# Altium PCB pcb - Copy.PcbDoc
Units mm, origin at the board's own origin, x right, y up, seen from the top; angles counter-clockwise.
Board outline 60 x 89 mm, 4 copper layers (Top Layer, Layer 1, Layer 2, Bottom Layer), stack 0.603 mm thick; 65 components, 43 nets, 221 pads, 96 vias.
Unrouted connection lines stored in the file: 3.
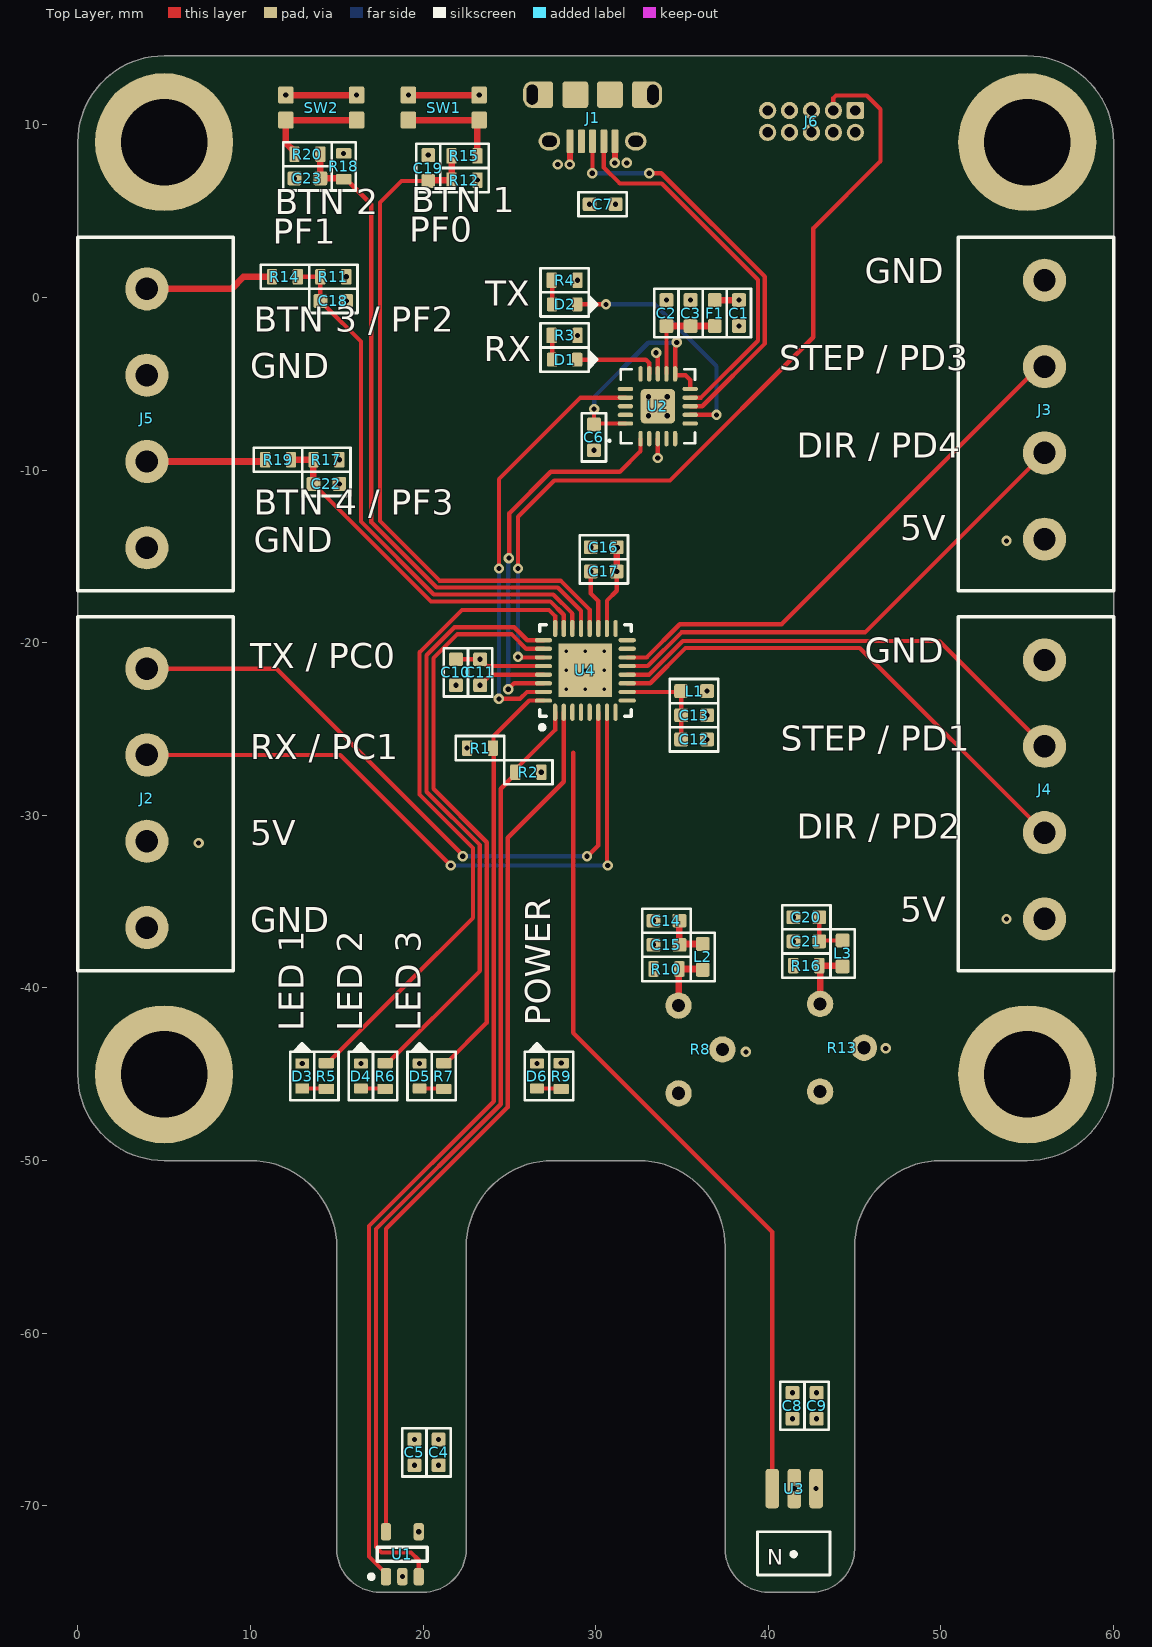
[diagram p0: Top Layer view]
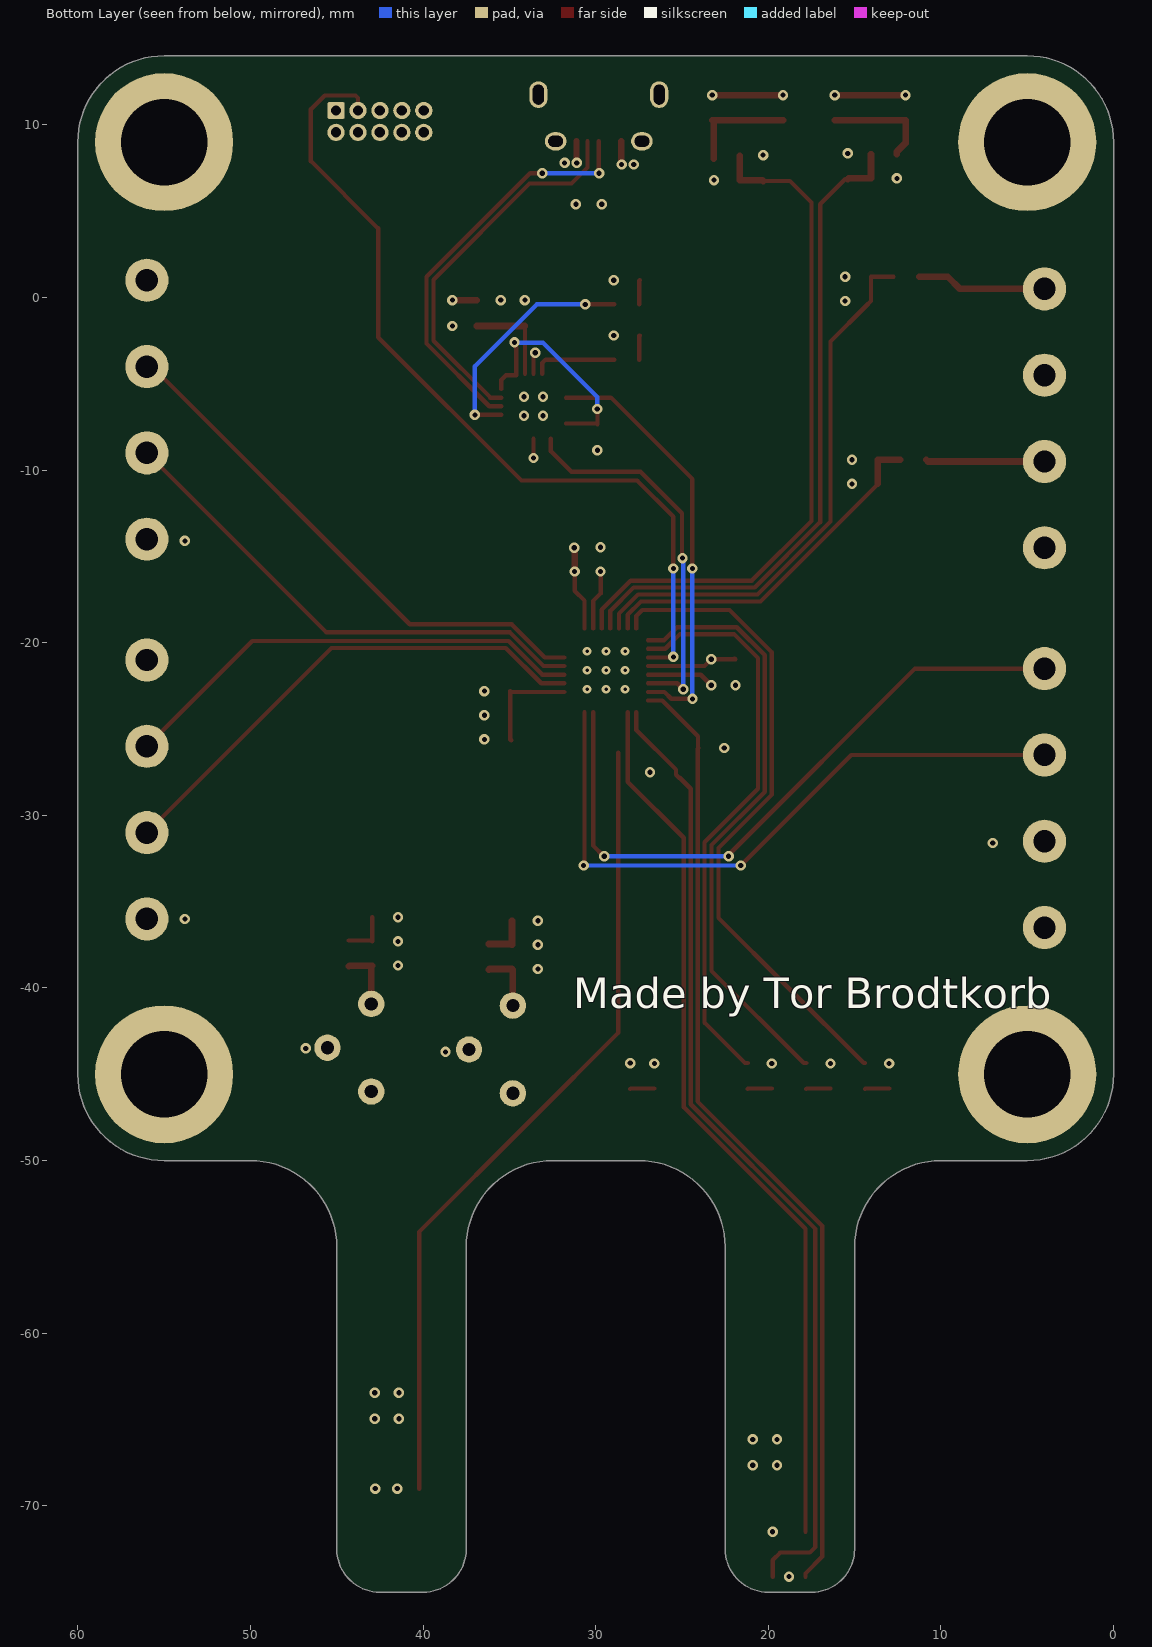
[diagram p1: Bottom Layer view, seen from below]
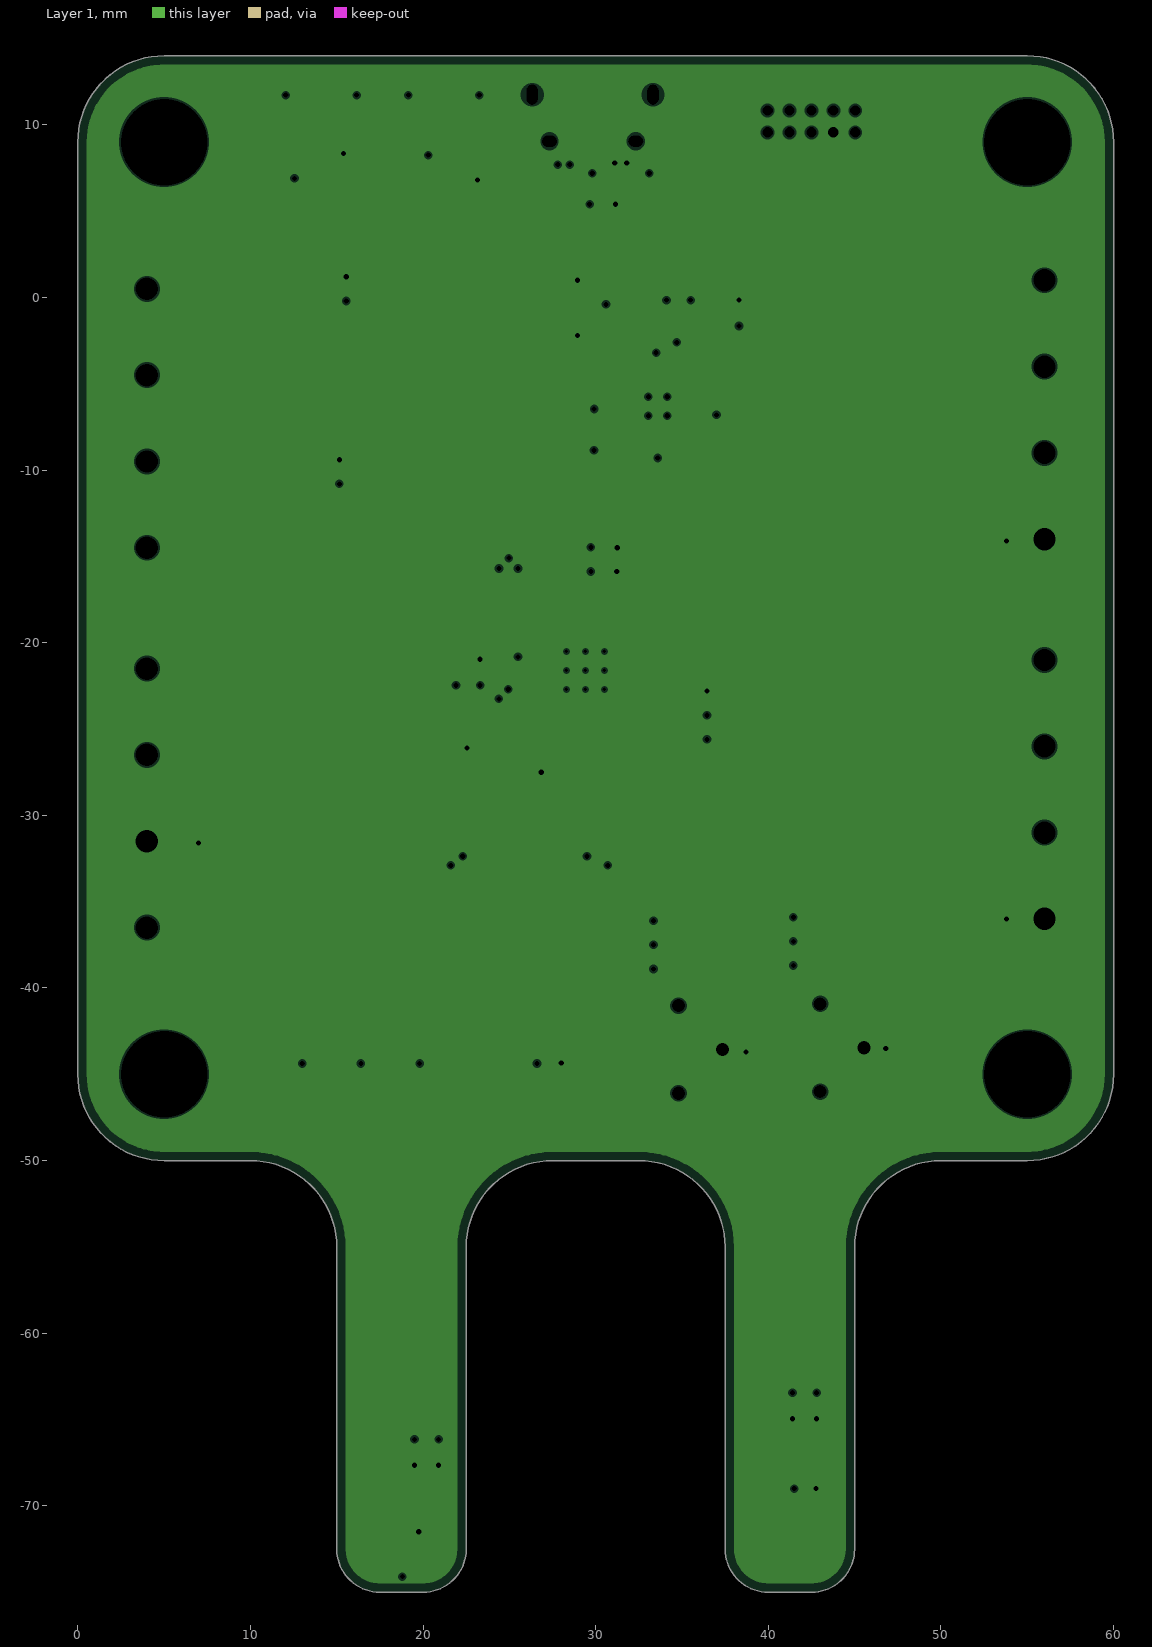
[diagram p2: Layer 1, clearances drawn from the general rule]
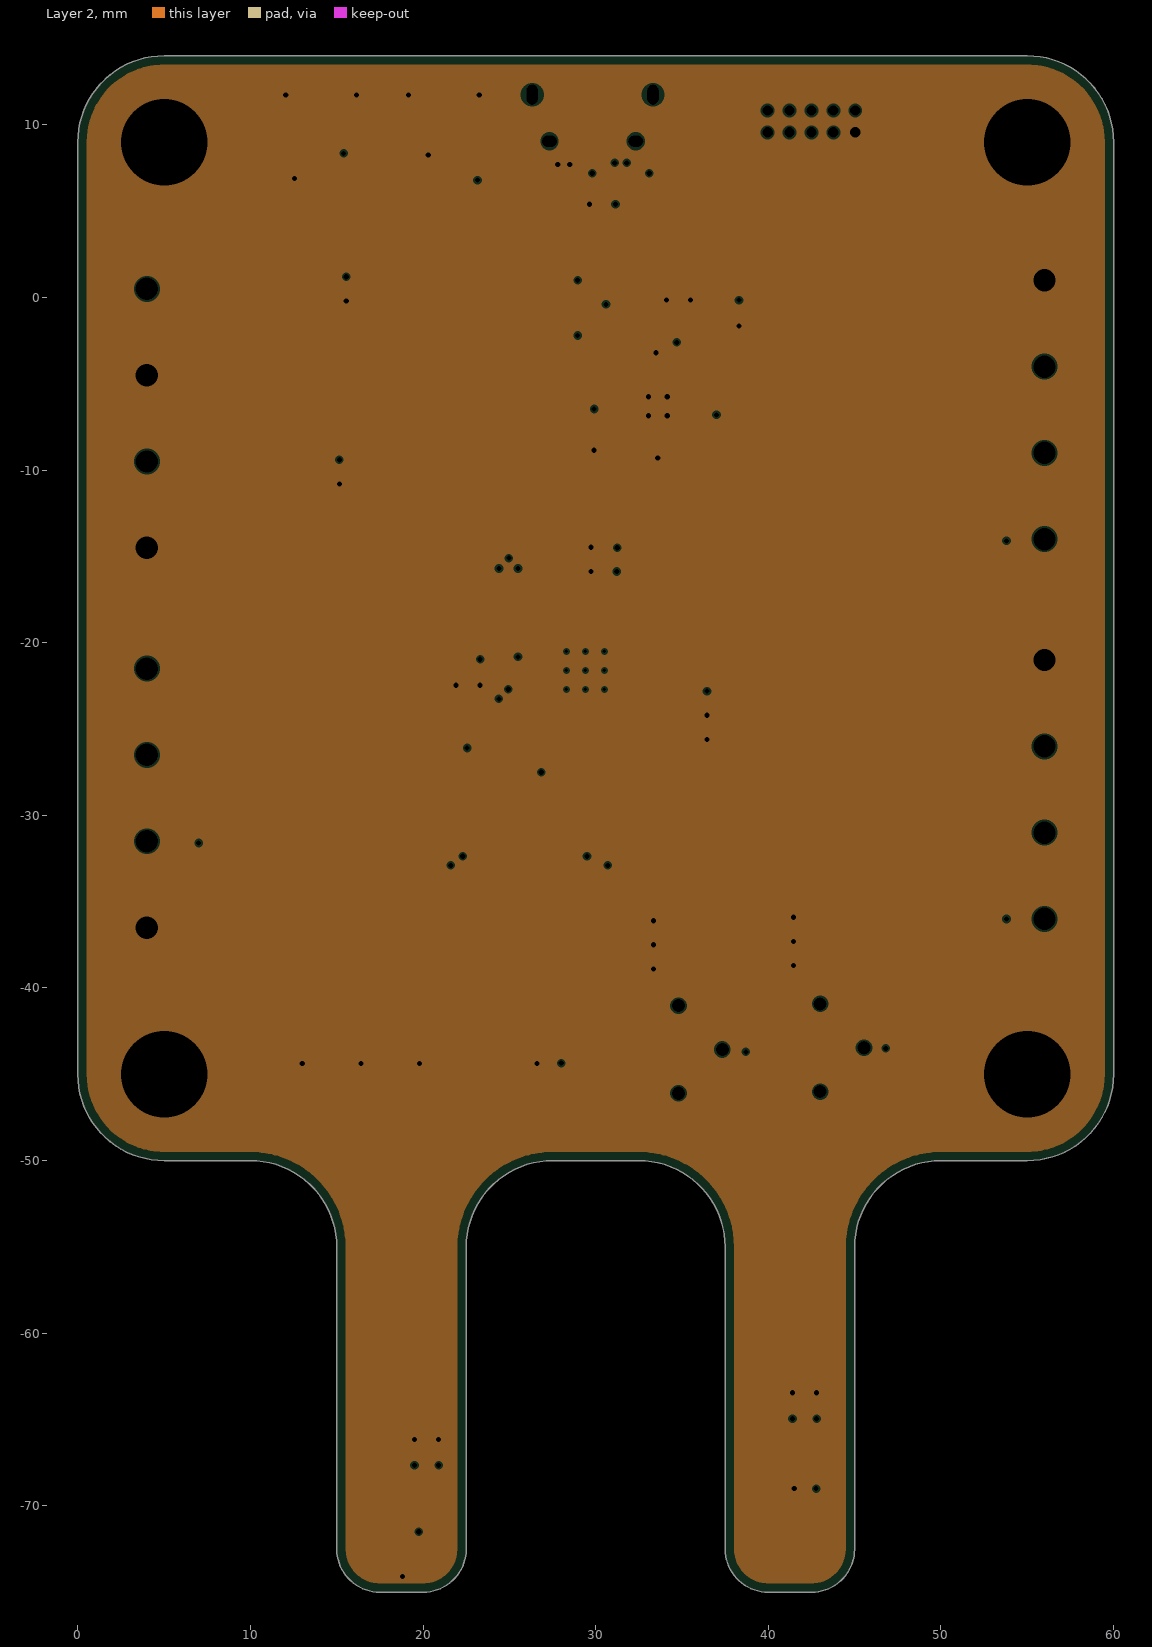
[diagram p3: Layer 2, clearances drawn from the general rule]
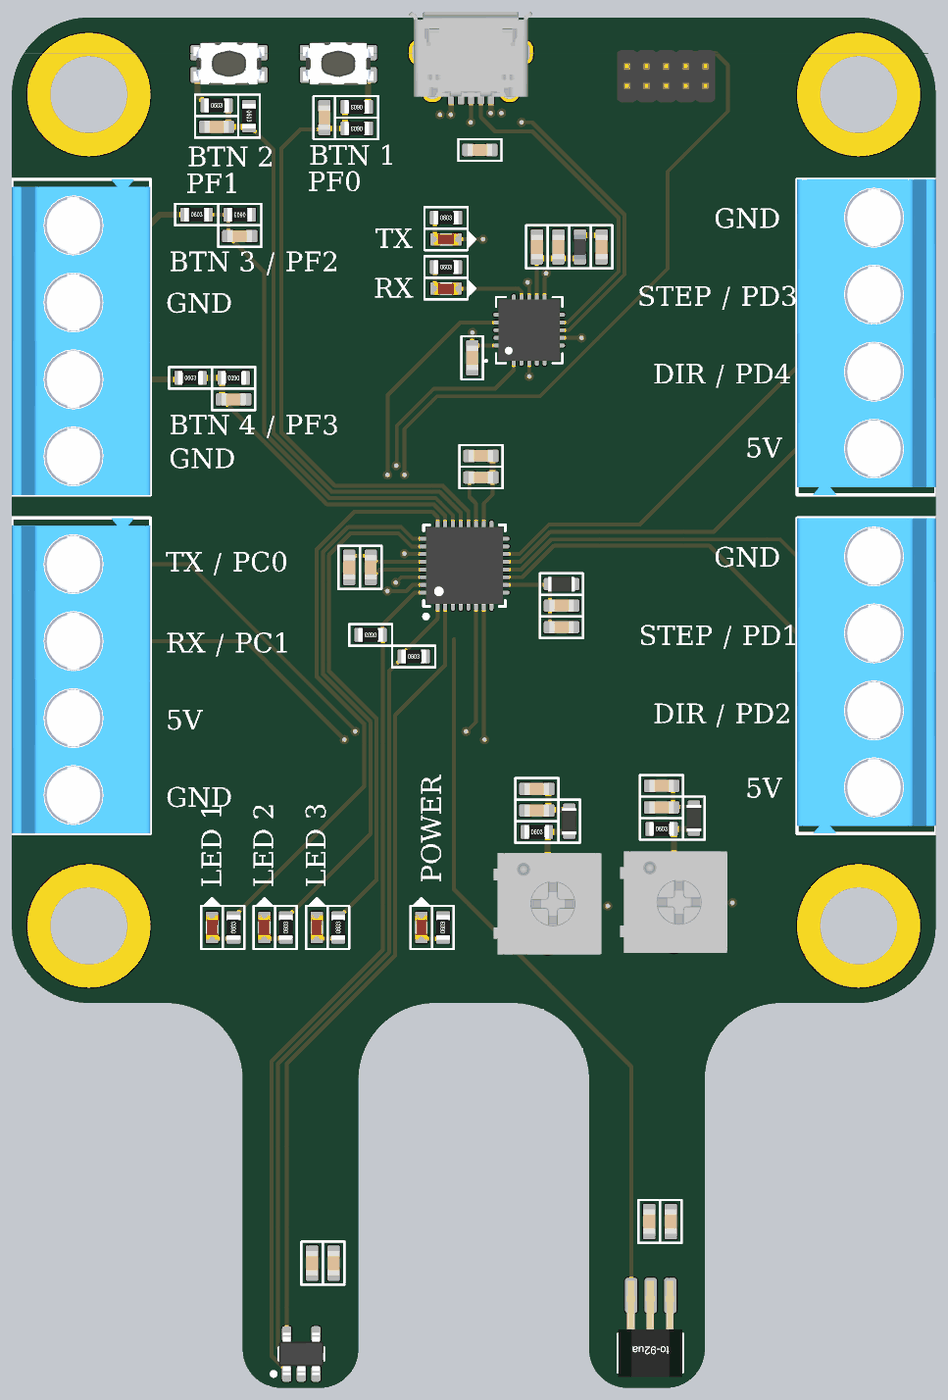
[diagram p4: 3D render of the assembled board from above, using the file's embedded part models]

## Layer stack, top to bottom
Top Solder: solder mask 0.0102, Solder Resist, Dk 3.5
Top Layer: signal copper 0.0356
Dielectric 2: prepreg 0.0711, PP-006, Dk 4.1
Layer 1: plane copper 0.035, net VDDIO2
Dielectric 1: dielectric 0.32, FR-4, Dk 4.8
Layer 2: plane copper 0.035, net GND
Dielectric 3: prepreg 0.0711, PP-006, Dk 4.1
Bottom Layer: signal copper 0.0356
Bottom Solder: solder mask 0.0102, Solder Resist, Dk 3.5

## Board outline
17.5,-75 cw(c17.5,-72.5) 15,-72.5 15,-55 ccw(c10,-55) 10,-50 5,-50 cw(c5,-45) 0,-45 0,9 cw(c5,9) 5,14 55,14 cw(c55,9) 60,9 60,-45 cw(c55,-45) 55,-50 50,-50 ccw(c50,-55) 45,-55 45,-72.5 cw(c42.5,-72.5) 42.5,-75 40,-75 cw(c40,-72.5) 37.5,-72.5 37.5,-55 ccw(c32.5,-55) 32.5,-50 27.5,-50 ccw(c27.5,-55) 22.5,-55 22.5,-72.5 cw(c20,-72.5) 20,-75

## Design rules (kind name [scope] priority, off if disabled: settings)
BoardOutlineClearance [All] p1: gap=0.198 ignorepadtopadclearanceinfootprint=FALSE except(0: Arc-SplitContinuation Track-SplitContinuation SMDPad-SplitContinuation THPad-SplitContinuation Via-SplitContinuation Fill-SplitContinuation Poly-SplitContinuation Region-SplitContinuation Text-SplitContinuation)
Clearance [All] p1: gap=0.152 ignorepadtopadclearanceinfootprint=TRUE except(0.305: Arc-Hole Track-Hole SMDPad-Hole THPad-Hole Via-Hole Fill-Hole Poly-Hole Region-Hole Text-Hole)
ComponentClearance [All] p1: gap=0.1 collisioncheckmode=3 verticalgap=0.1 showdistances=FALSE
DiffPairsRouting DiffPairsRouting_USB [InDifferentialPair('USB')] p1: maxlimit=0.5 minlimit=0.16 mostfreqgap=0.2 toplayer_minwidth=0.16 toplayer_maxwidth=5 toplayer_prefwidth=0.265 bottomlayer_minwidth=0.16 bottomlayer_maxwidth=5 bottomlayer_prefwidth=0.265 maxuncoupledlength=12.7
DiffPairsRouting DiffPairsRouting_ETH [InDifferentialPair('ETH_RX') or InDifferentialPair('ETH_TX')] p2: maxlimit=0.5 minlimit=0.16 mostfreqgap=0.194 toplayer_minwidth=0.16 toplayer_maxwidth=5 toplayer_prefwidth=0.22 bottomlayer_minwidth=0.16 bottomlayer_maxwidth=5 bottomlayer_prefwidth=0.22 maxuncoupledlength=12.7
DiffPairsRouting [All] p3: maxlimit=0.5 minlimit=0.16 mostfreqgap=0.3 toplayer_minwidth=0.16 toplayer_maxwidth=5 toplayer_prefwidth=0.3 bottomlayer_minwidth=0.16 bottomlayer_maxwidth=5 bottomlayer_prefwidth=0.3 maxuncoupledlength=12.7
HoleSize [All] p1: absolutevalues=TRUE maxlimit=6.3 minlimit=0.025 maxpercent=80.000 minpercent=20.000
MatchedLengths MatchedLengths_1 [InNetClass('RX')] p1: tolerance=2 checknetsindiffpair=FALSE checkdiffpairvsdiffpair=TRUE checkxsignals=TRUE checkothers=TRUE
MatchedLengths [InNetClass('TX')] p2: tolerance=2 checknetsindiffpair=FALSE checkdiffpairvsdiffpair=TRUE checkxsignals=TRUE checkothers=TRUE
MinimumAnnularRing [All] p1: minimumring=0.102
MinimumSolderMaskSliver [All] p1: minsoldermaskwidth=0.1
PlaneClearance [All] p1: clearance=0.1
PlaneConnect [All] p1: planeconnectstyle=Relief reliefexpansion=0.15 reliefentries=4 reliefconductorwidth=0.152 reliefairgap=0.2
PolygonConnect [All] p1: connectstyle=Relief reliefconductorwidth=0.152 reliefentries=4 polygonreliefangle="90 Angle" airgapwidth=0.152
RoutingVias [All] p1: holewidth=0.3 width=0.6 viastyle="Through Hole" minholewidth=0.2 minwidth=0.45 maxholewidth=6.3 maxwidth=10
SilkToSilkClearance [All] p1: silktosilkclearance=0.152
SilkToSolderMaskClearance [IsPad] p1: minsilkscreentomaskgap=0.152 clearancetoexposedcopper=TRUE
SolderMaskExpansion [All] p1: expansion=0.076 istentingtop=FALSE
Width [All] p1: maxlimit=10 minlimit=0.152 preferedwidth=0.152 minimp=50.000000 maximp=50.000000 favimp=50.000000
22 further rules are at their usual default settings.

## Components (designator, comment, footprint, x,y, rotation, side; value= is the part's Value field where it differs from the comment)
C1 "passive_5" "capacitor 0603" 38.3,-0.9 r90 top value=10nF
C2 "passive_5" "capacitor 0603" 34.1,-0.9 r270 top value=4.7uF
C3 "passive_5" "capacitor 0603" 35.5,-0.9 r270 top value=100nF
C4 "passive_5" "capacitor 0603" 20.9,-66.9 r270 top value=10uF
C5 "passive_5" "capacitor 0603" 19.5,-66.9 r270 top value=100nF
C6 "passive_5" "capacitor 0603" 29.9,-8.1 r90 top value=100nF
C7 "passive_5" "capacitor 0603" 30.4,5.4 r0 top value=10uF
C8 "passive_5" "capacitor 0603" 41.4,-64.2 r270 top value=10uF
C9 "passive_5" "capacitor 0603" 42.8,-64.2 r270 top value=100nF
C10 "passive_5" "capacitor 0603" 21.905,-21.71 r90 top value=10uF
C11 "passive_5" "capacitor 0603" 23.305,-21.71 r90 top value=100uF
C12 "passive_5" "capacitor 0603" 35.7,-25.6 r180 top value=10uF
C13 "passive_5" "capacitor 0603" 35.7,-24.2 r180 top value=100uF
C14 "passive_5" "capacitor 0603" 34.1,-36.1 r0 top value=100nF
C15 "passive_5" "capacitor 0603" 34.1,-37.5 r0 top value=10uF
C16 "passive_5" "capacitor 0603" 30.47,-14.47 r0 top value=10uF
C17 "passive_5" "capacitor 0603" 30.47,-15.87 r0 top value=100uF
C18 "passive_5" "capacitor 0603" 14.8,-0.2 r180 top value=100nF
C19 "passive_5" "capacitor 0603" 20.3,7.5 r270 top value=100nF
C20 "passive_5" "capacitor 0603" 42.2,-35.9 r0 top value=100nF
C21 "passive_5" "capacitor 0603" 42.2,-37.3 r0 top value=10uF
C22 "passive_5" "capacitor 0603" 14.4,-10.8 r180 top value=100nF
C23 "passive_5" "capacitor 0603" 13.3,6.9 r0 top value=100nF
D1 "LED Red" "LED 0603 red" 28.2,-3.6 r0 top
D2 "LED Red" "LED 0603 red" 28.2,-0.4 r0 top
D3 "LED Red" "LED 0603 red" 13,-45.1 r90 top
D4 "LED Red" "LED 0603 red" 16.4,-45.1 r90 top
D5 "LED Red" "LED 0603 red" 19.8,-45.1 r90 top
D6 "LED Red" "LED 0603 red" 26.6,-45.1 r90 top
F1 "passive_8" "ferrit bead 0603" 36.9,-0.9 r270 top value="480Ω @ 100MHz"
J1 "USB micro B" "USB mico B female" 29.82,10.4 r180 top
J2 "Header 2.54mm" TB001-500-04BE 4,-36.5 r90 top
J3 "Header 2.54mm" TB001-500-04BE 56,1 r270 top
J4 "Header 2.54mm" TB001-500-04BE 56,-21 r270 top
J5 "Header 2.54mm" TB001-500-04BE 4,-14.5 r90 top
J6 "Header 1.27mm" "header male 2x5, pitch 1.27mm" 42.5,10.2 r270 top
L1 "passive_9" "inductor 0603" 35.7,-22.8 r180 top value=10uH
L2 "passive_9" "inductor 0603" 36.2,-38.2 r90 top value=10uH
L3 "passive_9" "inductor 0603" 44.3,-38 r90 top value=10uH
R1 "passive_2" "resistor 0603" 23.3,-26.1 r180 top value=1kΩ
R2 "passive_2" "resistor 0603" 26.1,-27.5 r0 top value=1kΩ
R3 "passive_2" "resistor 0603" 28.2,-2.2 r0 top value=1kΩ
R4 "passive_2" "resistor 0603" 28.2,1 r0 top value=1kΩ
R5 "passive_2" "resistor 0603" 14.4,-45.1 r90 top value=1kΩ
R6 "passive_2" "resistor 0603" 17.8,-45.1 r90 top value=1kΩ
R7 "passive_2" "resistor 0603" 21.2,-45.1 r90 top value=1kΩ
R8 "passive_13" POT 37.34,-43.56 r270 top value=1kΩ
R9 "passive_2" "resistor 0603" 28,-45.1 r90 top value=1kΩ
R10 "passive_2" "resistor 0603" 34.1,-38.9 r0 top value=1kΩ
R11 "passive_2" "resistor 0603" 14.8,1.2 r180 top value=10kΩ
R12 "passive_2" "resistor 0603" 22.4,6.8 r180 top value=10kΩ
R13 "passive_13" POT 45.54,-43.46 r270 top value=1kΩ
R14 "passive_2" "resistor 0603" 12,1.2 r0 top value=1kΩ
R15 "passive_2" "resistor 0603" 22.4,8.2 r180 top value=1kΩ
R16 "passive_2" "resistor 0603" 42.2,-38.7 r0 top value=1kΩ
R17 "passive_2" "resistor 0603" 14.4,-9.4 r180 top value=10kΩ
R18 "passive_2" "resistor 0603" 15.4,7.6 r270 top value=10kΩ
R19 "passive_2" "resistor 0603" 11.6,-9.4 r0 top value=1kΩ
R20 "passive_2" "resistor 0603" 13.3,8.3 r0 top value=1kΩ
SW1 "sensor_3" "KMR621NG LFS" 21.2,11 r180 top
SW2 "sensor_3" "KMR621NG LFS" 14.1,11 r180 top
U1 "ic_14" SI7210-B-00-IVR 18.8,-72.8 r90 top
U2 "FTDI" FT231XQ-R 33.6,-6.3 r90 top
U3 "ic_15" SS495A1 42.77,-69 r180 top
U4 "cpu_7" AVRxxDB32 29.4,-21.6 r90 top

## Footprints (in the part's own frame and the unit in brackets; to place one, negate y for a bottom-side part, rotate by r counter-clockwise, add the part's x,y. Pads: shape width x height; smd on the part's side, far side on the other; paste and mask are expansions set on the pad)
AVRxxDB32 [mm] "QFN, 32-Leads, Body 5.00x5.00mm, Pitch 0.50mm, Thermal Pad 3.10x3.10mm, IPC Low Density"
  oval 1x0.25 smd: 1(-2.425,1.75) 2(-2.425,1.25) 3(-2.425,0.75) 4(-2.425,0.25) 5(-2.425,-0.25) 6(-2.425,-0.75) 7(-2.425,-1.25) 8(-2.425,-1.75) 17(2.425,-1.75) 18(2.425,-1.25) 19(2.425,-0.75) 20(2.425,-0.25) 21(2.425,0.25) 22(2.425,0.75) 23(2.425,1.25) 24(2.425,1.75)
  oval 0.25x1 smd: 9(-1.75,-2.425) 10(-1.25,-2.425) 11(-0.75,-2.425) 12(-0.25,-2.425) 13(0.25,-2.425) 14(0.75,-2.425) 15(1.25,-2.425) 16(1.75,-2.425) 25(1.75,2.425) 26(1.25,2.425) 27(0.75,2.425) 28(0.25,2.425) 29(-0.25,2.425) 30(-0.75,2.425) 31(-1.25,2.425) 32(-1.75,2.425)
  rect 3.1x3.1 smd: 33(0,0)
  silkscreen extent -3.42,-2.65 2.65,2.65, body extent -2.5,-2.5 2.5,2.5, height 0.8
"capacitor 0603" [mm]
  rrect25% 0.8x0.8 smd: 1(-0.75,0) 2(0.75,0)
  silkscreen extent -1.4,-0.7 1.4,0.7, body extent -0.8,-0.4 0.8,0.4, height 0.8
"ferrit bead 0603" [mm]
  rrect25% 0.8x0.8 smd: 1(-0.75,0) 2(0.75,0)
  silkscreen extent -1.4,-0.7 1.4,0.7, body extent -0.79,-0.4 0.81,0.4, height 0.8
FT231XQ-R [mm] "QFN, 20-Leads, Body 4.00x4.00mm, Pitch 0.50mm, Thermal Pad 1.98x1.98mm, IPC Medium Density"
  oval 0.9x0.25 smd: 1(-1.875,1) 2(-1.875,0.5) 3(-1.875,0) 4(-1.875,-0.5) 5(-1.875,-1) 11(1.875,-1) 12(1.875,-0.5) 13(1.875,0) 14(1.875,0.5) 15(1.875,1)
  oval 0.25x0.9 smd: 6(-1,-1.875) 7(-0.5,-1.875) 8(0,-1.875) 9(0.5,-1.875) 10(1,-1.875) 16(1,1.875) 17(0.5,1.875) 18(0,1.875) 19(-0.5,1.875) 20(-1,1.875)
  rrect20% 1.98x1.98 smd: 21(0,0)
  silkscreen extent -2.15,-2.15 2.15,2.85, body extent -2,-2 2,2, height 0.8
"header male 2x5, pitch 1.27mm" [mm]
  rrect25% 1x1 hole 0.6: 1(-0.635,2.54)
  round 1 hole 0.6: 2(0.635,2.54) 3(-0.635,1.27) 4(0.635,1.27) 5(-0.635,0) 6(0.635,0) 7(-0.635,-1.27) 8(0.635,-1.27) 9(-0.635,-2.54) 10(0.635,-2.54)
  body extent -1.7,-3.17 1.7,3.17, height 5.35
"inductor 0603" [mm]
  rrect25% 0.8x0.8 smd: 1(-0.75,0) 2(0.75,0)
  silkscreen extent -1.4,-0.7 1.4,0.7, body extent -0.87,-0.48 0.87,0.48, height 0.91
"KMR621NG LFS" [mm]
  rrect25% 0.9x1 smd: 1(-2.05,0.725) 1(2.05,0.725) 2(-2.05,-0.725) 2(2.05,-0.725)
  body extent -2.3,-1.4 2.3,1.4, height 1.9
"LED 0603 red" [mm]
  rrect25% 0.6x0.8 smd: 1(-0.725,0) 2(0.725,0)
  silkscreen extent -1.4,-0.7 1.9,0.7, body extent -0.8,-0.4 0.8,0.4, height 0.6
POT [mil]
  round 60 hole 30: 1(100,-100) 2(0,0) 3(-100,-100)
  body extent -130,-238 130,37, height 185
"resistor 0603" [mm]
  rrect25% 0.6x0.9 smd: 1(-0.75,0) 2(0.75,0)
  silkscreen extent -1.4,-0.7 1.4,0.7, body extent -0.8,-0.45 0.8,0.45, height 0.5
SI7210-B-00-IVR [mm] "SOT23, 5-Leads, Body 2.90x2.75mm, Pitch 0.95mm, IPC Medium Density"
  rrect50% 1x0.6 smd: 1(-1.3,0.95) 2(-1.3,0) 3(-1.3,-0.95) 4(1.3,-0.95) 5(1.3,0.95)
  silkscreen extent -1.42,-1.45 0.4,1.92, body extent -1.38,-1.45 1.38,1.45, height 1.25
SS495A1 [mm]
  rrect50% 0.8x2.3 smd: 1(0,0) 2(1.27,0) 3(2.54,0)
  silkscreen extent -0.8,2.5 3.4,5, body extent -0.79,-0.96 3.38,5.3, height 1.34
TB001-500-04BE [mm]
  round 2.5 hole 1.3: 1(15,0) 2(10,0) 3(5,0) 4(0,0)
  silkscreen extent -2.5,-5 18,4, body extent -2.5,-5 18,4, height 12.5
"USB mico B female" [mm]
  rrect25% 0.4x1.35 smd: 1(-1.3,1.35) 2(-0.65,1.35) 3(0,1.35) 4(0.65,1.35) 5(1.3,1.35)
  rrect100% 1.05x1.55 hole 0.65 slot 1.15 at 90 deg: 6(-3.5,-1.35) 6(3.5,-1.35)
  rrect25% 1.37x1.55 smd: 6(-2.975,-1.35) 6(2.975,-1.35)
  rrect100% 1.25x1.05 hole 0.65 slot 0.85 at 0 deg: 6(-2.5,1.35) 6(2.5,1.35)
  rrect25% 1.5x1.55 smd: 6(-1,-1.35) 6(1,-1.35)
  body extent -4.01,-3.99 4.03,1.59, height 2.76

## Part data
C1 C2 C3 C4 C5 C6 C7 C8 C9 C10 C11 C12 C13 C14 C15 C16 C17 C18 C19 C20 C21 C22 C23: "Capacitor 0603"
D1 D2 D3 D4 D5 D6: library part diode_0, "LED 0603 red"
F1: "Ferrite bead 0603"
J1: library part connector_34, "USB micro B (2.0)", Manufacturer 1="Amphenol ICC (FCI)", Manufacturer Part Number 1=10118194-0001LF, Supplier Part Number 1=609-4618-1-ND, Link=https://www.digikey.no/product-detail/en/amphenol-icc-fci/10118194-0001LF/609-4618-1-ND/2785382, Supplier 1=Digi-Key
J2 J3 J4 J5: library part connector_53, "Screw Terminal"
J6: library part connector_17, "Header male 2x5, pitch 1.27mm"
L1 L2 L3: "Inductor 0603"
R1 R2 R3 R4 R5 R6 R7 R9 R10 R11 R12 R14 R15 R16 R17 R18 R19 R20: "Resistor 0603"
R8 R13: "Potmeter"
SW1 SW2: "Tactile switch SMD, tiny", Manufacturer 1=C&K, Manufacturer Part Number 1="KMR621NG LFS", Supplier Part Number 1=CKN10684CT-ND, Link=https://www.digikey.no/product-detail/en/c-k/KMR621NG-LFS/CKN10684CT-ND/6035356, Supplier 1=Digi-Key
U1: "Hall-effect", Supplier Part Number 1=SI7210-B-00-IVR
U2: library part ic_1, "USB to UART converter, FTDI, single, 20 pins, QFN", Manufacturer 1="FTDI, Future Technology Devices International Ltd", Manufacturer Part Number 1=FT231XQ-R, Supplier Part Number 1=768-1128-1-ND, Supplier 1=Digi-Key
U3: "SS495A1"
U4: "AVRxxDB32"

## Free pads (board coordinates)
  round 8 hole 5: ""(5,-45) ""(5,9) ""(55,9) ""(55,-45)

## Via types
v1: diameter 0.6, hole 0.3, Top Layer to Bottom Layer, tented both sides, 83 vias
v2: diameter 0.5, hole 0.2, Top Layer to Bottom Layer, 9 vias
v3: diameter 0.6, hole 0.3, Top Layer to Bottom Layer, 4 vias

## Nets (pads, with @x,y where several pads share a name; then routed paths per layer and width w, separated by ;. In a path a pad name is that pad's centre, name@x,y a point inside that pad or via, vN(x,y) a via of type N, cw(c..) or ccw(c..) an arc to the next point about the centre after c; other vN are vias at no path point)
5V: C1.2 C4.2 C5.2 C7.2 C8.2 C9.2 C10.2 C11.2 C16.2 C17.2 F1.1 J1.1 J2.3 J3.1 J4.1 J6.4 L1.1 R1.2 R2.2 R3.2 R4.2 R8.2 R9.2 R11.1 R12.1 R13.2 R17.1 R18.1 U1.4 U3.1 U4.18 U4.28 | length 13
  Top Layer w0.25: C10.2@21.955,-20.91 C10.2 v1(23.305,-20.96) 23.695,-21.35 U4.28 ; U4.18 30.65,-17.56 31.22,-16.99 v1(31.22,-15.87) ; v1(31.1,7.8) v1@31.12,7.82 ; C16.2 C16.2@31.27,-14.52
  Top Layer w0.35: v1@31.12,7.82 J1.1
  Top Layer w0.381: v1(31.22,-15.87) C16.2 ; F1.1 v1(38.3,-0.15)
  other v1: 19.75,-71.5 42.77,-69 19.5,-67.65 20.9,-67.65 41.4,-64.95 42.8,-64.95 28,-44.35 38.7,-43.7 46.8,-43.5 53.8,-36 7,-31.6 26.85,-27.5 22.55,-26.1 36.45,-22.8 31.245,-14.495 53.8,-14.1 15.15,-9.4 28.95,-2.2 28.95,1 15.55,1.2 31.15,5.4 23.15,6.8 31.8,7.8 15.4,8.35
ALERT: U1.5 U4.2 | length 51.7
  Top Layer w0.25: U1.5 17.85,-53.95 24.9,-46.9 24.9,-31.3 28.15,-28.05 U4.2
DIR1: J4.3 U4.12 | length 27.5
  Top Layer w0.25: U4.12 33.088,-21.85 35.041,-19.898 49.898,-19.898 J4.3
DIR2: J3.3 U4.14 | length 31.2
  Top Layer w0.25: U4.14 32.95,-20.85 34.87,-18.93 40.77,-18.93 55.7,-4 J3.3
EXT_RX: J2.2 U4.7 | length 38.2
  Top Layer w0.25: J2.2 15.2,-26.5 v1(21.6,-32.9) ; U4.7 30.65,-32.796 30.7,-32.846 v1(30.7,-32.9)
  Bottom Layer w0.25: v1(21.6,-32.9) v1(30.7,-32.9)
EXT_TX: J2.1 U4.6 | length 38.7
  Top Layer w0.25: J2.1 11.5,-21.5 22.2,-32.2 22.2,-32.246 22.3,-32.346 v1(22.3,-32.37) ; v1(29.5,-32.37) 29.53,-32.37 30.15,-31.75 U4.6
  Bottom Layer w0.25: v1(22.3,-32.37) v1(29.5,-32.37)
GND: C1.1 C2.1 C3.1 C4.1 C5.1 C6.1 C7.1 C8.1 C9.1 C10.1 C11.1 C12.1 C13.1 C14.1 C15.1 C16.1 C17.1 C18.1 C19.1 C20.1 C21.1 C22.1 C23.1 D3.2 D4.2 D5.2 D6.2 J1.5 J2.4 J3.4 J4.4 J5.2 J5.4 J6.2 pad. R10.1 R16.1 SW1.2 SW2.2 U1.2 U2.3 U2.13 U2.21 U3.2 U4.19 U4.29 | length 19.4
  Top Layer w0.25: v1(23.305,-22.46) 23.915,-21.85 U4.29 ; v1(29.72,-15.87) 29.715,-15.875 29.715,-17.145 30.15,-17.58 U4.19 ; v1(33.5,-3.2) 33.5,-3.295 33.6,-3.395 U2.13 ; v1(33.6,-9.3) U2.3
  Top Layer w0.35: v1@28.52,7.7 J1.5
  Top Layer w0.381: v1(12.05,11.725) v1(16.15,11.725) ; v1(19.15,11.725) v1(23.25,11.725)
  other v1: 18.8,-74.1 41.5,-69 19.5,-66.15 20.9,-66.15 41.4,-63.45 42.8,-63.45 13,-44.375 16.4,-44.375 19.8,-44.375 26.6,-44.375 33.35,-38.9 41.45,-38.7 33.35,-37.5 41.45,-37.3 33.35,-36.1 41.45,-35.9 36.45,-25.6 36.45,-24.2 21.905,-22.46 29.72,-14.47 15.15,-10.8 29.9,-8.85 38.3,-1.65 15.55,-0.2 34.1,-0.15 35.5,-0.15 29.65,5.4 12.55,6.9 27.8,7.7 28.5,7.7 20.3,8.25
  other v3: 33.05,-6.85 34.15,-6.85 33.05,-5.75 34.15,-5.75
HALL: U3.3 U4.15 | length 47.4
  Top Layer w0.25: 28.7,-26.375 28.7,-42.6 33.7,-47.6 40.23,-54.13 U3.3
LED1: R5.2 U4.24 | length 38.4
  Top Layer w0.25: R5.2 14.475,-44.35 18.9,-39.925 22.888,-35.937 22.888,-31.888 19.795,-28.795 19.795,-20.557 22.252,-18.1 27.3,-18.1 27.65,-18.45 U4.24
LED2: R6.2 U4.25 | length 35
  Top Layer w0.25: R6.2 17.95,-44.35 23.29,-39.01 23.29,-31.721 20.198,-28.629 20.198,-20.723 21.823,-19.098 25.287,-19.098 26.039,-19.85 U4.25
LED3: R7.2 U4.26 | length 33.2
  Top Layer w0.25: R7.2 21.35,-44.35 23.693,-42.007 23.693,-31.555 20.6,-28.462 20.6,-20.89 21.99,-19.5 25.12,-19.5 25.97,-20.35 U4.26
NetC2_2: C2.2 C3.2 F1.2 U2.12 | length 5.6
  Top Layer w0.25: U2.12 34.1,-3.649 C2.2
  Top Layer w0.381: C2.2 C3.2 F1.2
NetC6_2: C6.2 U2.10 U2.11 U2.20 | length 12.9
  Top Layer w0.25: C6.2@29.895,-7.345 C6.2@29.9,-7.341 ; C6.2 C6.2@29.9,-7.341 ; v1(29.91,-6.46) 29.9,-6.47 C6.2@29.9,-7.341 ; U2.20 29.941,-7.3 C6.2@29.9,-7.341 ; U2.11@34.6,-4.5 35.2,-4.5 35.475,-4.775 U2.10 ; U2.11 34.6,-3.2 34.6,-2.921 34.633,-2.888 34.633,-2.667 v1(34.7,-2.6)
  Bottom Layer w0.25: v1(29.91,-6.46) 29.91,-5.76 33.05,-2.62 34.68,-2.62 v1(34.7,-2.6)
NetC14_2: C14.2 C15.2 L2.2 U4.16 | length 2.8
  Top Layer w0.381: C14.2 C15.2 34.9,-37.45 L2.2
NetC20_2: C20.2 C21.2 L3.2 U4.17 | length 2.8
  Top Layer w0.25: C20.2 C21.2 43,-37.25 L3.2
NetD1_1: D1.1 R3.1 | length 1.4
  Top Layer w0.25: R3.1 27.475,-2.225 D1.1
NetD2_1: D2.1 R4.1 | length 1.4
  Top Layer w0.25: R4.1 27.475,0.975 D2.1
NetD3_1: D3.1 R5.1 | length 1.4
  Top Layer w0.25: D3.1 14.375,-45.825 R5.1
NetD4_1: D4.1 R6.1 | length 1.4
  Top Layer w0.25: D4.1 17.775,-45.825 R6.1
NetD5_1: D5.1 R7.1 | length 1.4
  Top Layer w0.25: D5.1 21.175,-45.825 R7.1
NetD6_1: D6.1 R9.1 | length 1.4
  Top Layer w0.25: D6.1 27.975,-45.825 R9.1
NetJ1_2: J1.2 U2.9 | length 22
  Top Layer w0.25: J1.2 30.47,7.53 31.4,6.6 33.831,6.6 39.398,1.033 39.398,-2.502 36.1,-5.8 U2.9
NetJ1_3: J1.3 U2.8 | length 24
  Top Layer w0.25: v1(29.8,7.2) 29.82,7.22 J1.3 ; v1(33.1,7.2) 33.8,7.2 39.8,1.2 39.8,-2.669 36.169,-6.3 U2.8
  Bottom Layer w0.25: v1(29.8,7.2) v1(33.1,7.2)
NetJ5_1: J5.1 R14.1 | length 7.5
  Top Layer w0.381: J5.1 8.9,0.5 9.6,1.2 R14.1
NetJ5_3: J5.3 R19.1 | length 6.9
  Top Layer w0.381: J5.3 10.75,-9.5 R19.1
NetJ6_3: J6.3 U4.27 | length 49.7
  Top Layer w0.25: v1(25.5,-20.82) 25.53,-20.85 U4.27 ; v1(25.5,-15.7) 25.5,-12.7 27.6,-10.6 34.3,-10.6 42.602,-2.298 42.602,4.002 46.5,7.9 46.5,10.9 45.7,11.7 43.916,11.7 43.77,11.554 J6.3
  Bottom Layer w0.25: v1(25.5,-20.82) v1(25.5,-15.7)
NetL2_1: L2.1 R8.3 R10.2 | length 3.5
  Top Layer w0.381: R8.3 34.8,-38.95 R10.2 36.15,-38.9 L2.1
NetL3_1: L3.1 R13.3 R16.2 | length 3.6
  Top Layer w0.381: R13.3 43,-38.75 R16.2 44.25,-38.7 L3.1
NetR15_1: R15.1 SW1.1 | length 6.4
  Top Layer w0.381: SW1.1@19.15,10.275 23.25,10.275 23.15,10.175 R15.1 R15.1@23.15,8.05
NetR20_1: R20.1 SW2.1 | length 6.3
  Top Layer w0.381: R20.1 12.55,8.45 12.05,8.95 12.05,10.275 SW2.1@16.15,10.275
RXLED: D1.2 U2.14 | length 4.9
  Top Layer w0.25: D1.2 32.9,-3.6 33.1,-3.8 U2.14
SCL: R2.1 U1.3 U4.1 | length 56.4
  Top Layer w0.25: U1.3 19.75,-73.15 19.3,-72.7 17.594,-72.7 17.273,-72.379 17.273,-53.958 24.498,-46.733 24.498,-28.452 25.125,-27.825 25.175,-27.825 25.35,-27.65 25.35,-27.35 27.65,-25.05 U4.1
SDA: R1.1 U1.1 U4.32 | length 55.9
  Top Layer w0.25: U1.1 17.85,-73.914 16.87,-72.934 16.87,-53.792 24.095,-46.567 24.095,-26.145 R1.1 24.079,-26.071 24.079,-25.421 26.15,-23.35 U4.32
STEP1: J4.2 U4.11 | length 29.5
  Top Layer w0.25: U4.11 33.157,-22.35 35.207,-20.3 45.3,-20.3 J4.2
STEP2: J3.2 U4.13 | length 29.3
  Top Layer w0.25: U4.13 33.019,-21.35 34.969,-19.4 45.6,-19.4 J3.2
SW1: C19.2 R12.2 R15.2 U4.20 | length 39.9
  Top Layer w0.25: C19.2 18.75,6.75 17.5,5.5 17.5,-12.943 20.957,-16.4 27.969,-16.4 29.65,-18.081 U4.20
  Top Layer w0.381: C19.2 20.35,6.8 R12.2 R15.2
SW2: C23.2 R18.2 R20.2 U4.21 | length 38.7
  Top Layer w0.25: R18.2 15.55,6.85 17,5.4 17,-13.012 20.791,-16.802 27.802,-16.802 29.15,-18.15 U4.21
  Top Layer w0.381: R20.2 C23.2 15.35,6.9 R18.2
SW3: C18.2 R11.2 R14.2 U4.22 | length 31.8
  Top Layer w0.25: R14.2 R11.2 C18.2 14.325,-0.475 16.4,-2.55 16.4,-12.981 20.624,-17.205 27.543,-17.205 28.65,-18.312 U4.22
SW4: C22.2 R17.2 R19.2 U4.23 | length 21.1
  Top Layer w0.25: C22.2 20.457,-17.607 27.376,-17.607 28.15,-18.381 U4.23
  Top Layer w0.381: R19.2 R17.2 C22.2
TXLED: D2.2 U2.7 | length 13.9
  Top Layer w0.25: D2.2 v1(30.6,-0.4) ; U2.7 v1(37,-6.8)
  Bottom Layer w0.25: v1(30.6,-0.4) 33.42,-0.4 37,-3.98 v1(37,-6.8)
USB_RX: U2.17 U4.31 | length 24.8
  Top Layer w0.25: v1(24.39,-23.25) 25.62,-23.25 26.02,-22.85 U4.31 ; v1(24.4,-15.7) 24.4,-10.521 29.121,-5.8 31.4,-5.8 U2.17
  Bottom Layer w0.25: v1(24.39,-23.25) 24.4,-23.24 v1(24.4,-15.7)
USB_TX: U2.1 U4.30 | length 22.2
  Top Layer w0.25: v1(24.93,-22.695) 25.275,-22.35 U4.30 ; v1(24.97,-15.1) 25,-15.07 25,-12.5 27.4,-10.1 31.4,-10.1 32.6,-8.9 U2.1
  Bottom Layer w0.25: v1(24.93,-22.695) 24.93,-15.195 24.97,-15.154 v1(24.97,-15.1)
VDDIO2: C12.2 C13.2 L1.2 U4.10 | length 6
  Top Layer w0.25: U4.10 34.9,-22.85 L1.2 C13.2 C12.2 C12.2@34.9,-25.65
pads on no net: J1.4 J1.6 J6.1 J6.5 J6.6 J6.7 J6.8 J6.9 J6.10 R8.1 R13.1 U2.2 U2.4 U2.5 U2.6 U2.15 U2.16 U2.18 U2.19 U4.3 U4.4 U4.5 U4.8 U4.9 U4.33
copper on no net:
  other v2: 28.3,-22.7 29.4,-22.7 30.5,-22.7 28.3,-21.6 29.4,-21.6 30.5,-21.6 28.3,-20.5 29.4,-20.5 30.5,-20.5

## Polygon pours and split planes (outlines as drawn)
5V on Layer 1 (split plane): 302 vertices, not listed, extent 0.509,-74.491 59.491,13.491
GND on Layer 2 (split plane): 302 vertices, not listed, extent 0.509,-74.491 59.491,13.491

## Silkscreen, mask and mechanical layers (free items; w line width, h text height)
Top Overlay:
  text "BTN 1" at 19.302,4.436 h2.5
  text "BTN 2" at 11.402,4.336 h2.5
  text "PF0" at 19.202,2.735 h2.5
  text "PF1" at 11.302,2.607 h2.5
  text "GND" at 45.6,0.336 h2.5
  text "TX" at 23.606,-0.965 h2.5
  text "BTN 3 / PF2" at 10.202,-2.478 h2.5
  text "RX" at 23.502,-4.193 h2.5
  text "STEP / PD3" at 40.628,-4.717 h2.5
  text "GND" at 10,-5.164 h2.5
  text "DIR / PD4" at 41.639,-9.77 h2.5
  text "BTN 4 / PF3" at 10.202,-13.078 h2.5
  text "5V" at 47.649,-14.567 h2.5
  text "GND" at 10.2,-15.264 h2.5
  text "GND" at 45.6,-21.664 h2.5
  text "TX / PC0" at 10,-21.978 h2.5
  text "STEP / PD1" at 40.713,-26.75 h2.5
  text "RX / PC1" at 10.002,-27.234 h2.5
  text "DIR / PD2" at 41.652,-31.837 h2.5
  text "5V" at 10.002,-32.234 h2.5
  text "5V" at 47.649,-36.667 h2.5
  text "GND" at 10,-37.264 h2.5
  text "POWER" at 27.867,-42.198 h2.5 r90
  text "LED 1" at 13.593,-42.5 h2.5 r90
  text "LED 2" at 16.97,-42.5 h2.5 r90
  text "LED 3" at 20.369,-42.5 h2.5 r90
Bottom Overlay:
  text "Made by Tor Brodtkorb" at 31.298,-41.742 h3
Mechanical 5:
  lines w0.01: 37.5,-55 ccw(c37.5,-55) 37.5,-55 ; 37.5,-55 ccw(c32.5,-55) 32.5,-50 27.5,-50 ccw(c27.5,-55) 22.5,-55 22.5,-72.5 cw(c20,-72.5) 20,-75 17.5,-75 cw(c17.5,-72.5) 15,-72.5 15,-55 ccw(c10,-55) 10,-50 5,-50 cw(c5,-45) 0,-45 0,9 cw(c5,9) 5,14 55,14 cw(c55,9) 60,9 60,-45 cw(c55,-45) 55,-50 50,-50 ccw(c50,-55) 45,-55 45,-72.5 cw(c42.5,-72.5) 42.5,-75 40,-75 cw(c40,-72.5) 37.5,-72.5 37.5,-55

## Text inside footprints (layer, text, board x,y; h text height)
U3: Top Overlay "N" at 40.86,-72.51 h0.9 r180